# Altium PCB PCB1.PcbDoc
Units mil, origin at the board's own origin, x right, y up, seen from the top; angles counter-clockwise.
Board outline 6000 x 4000 mil, 2 copper layers (Top Layer, Bottom Layer); 4 components, 0 nets, 12 pads, 0 vias.
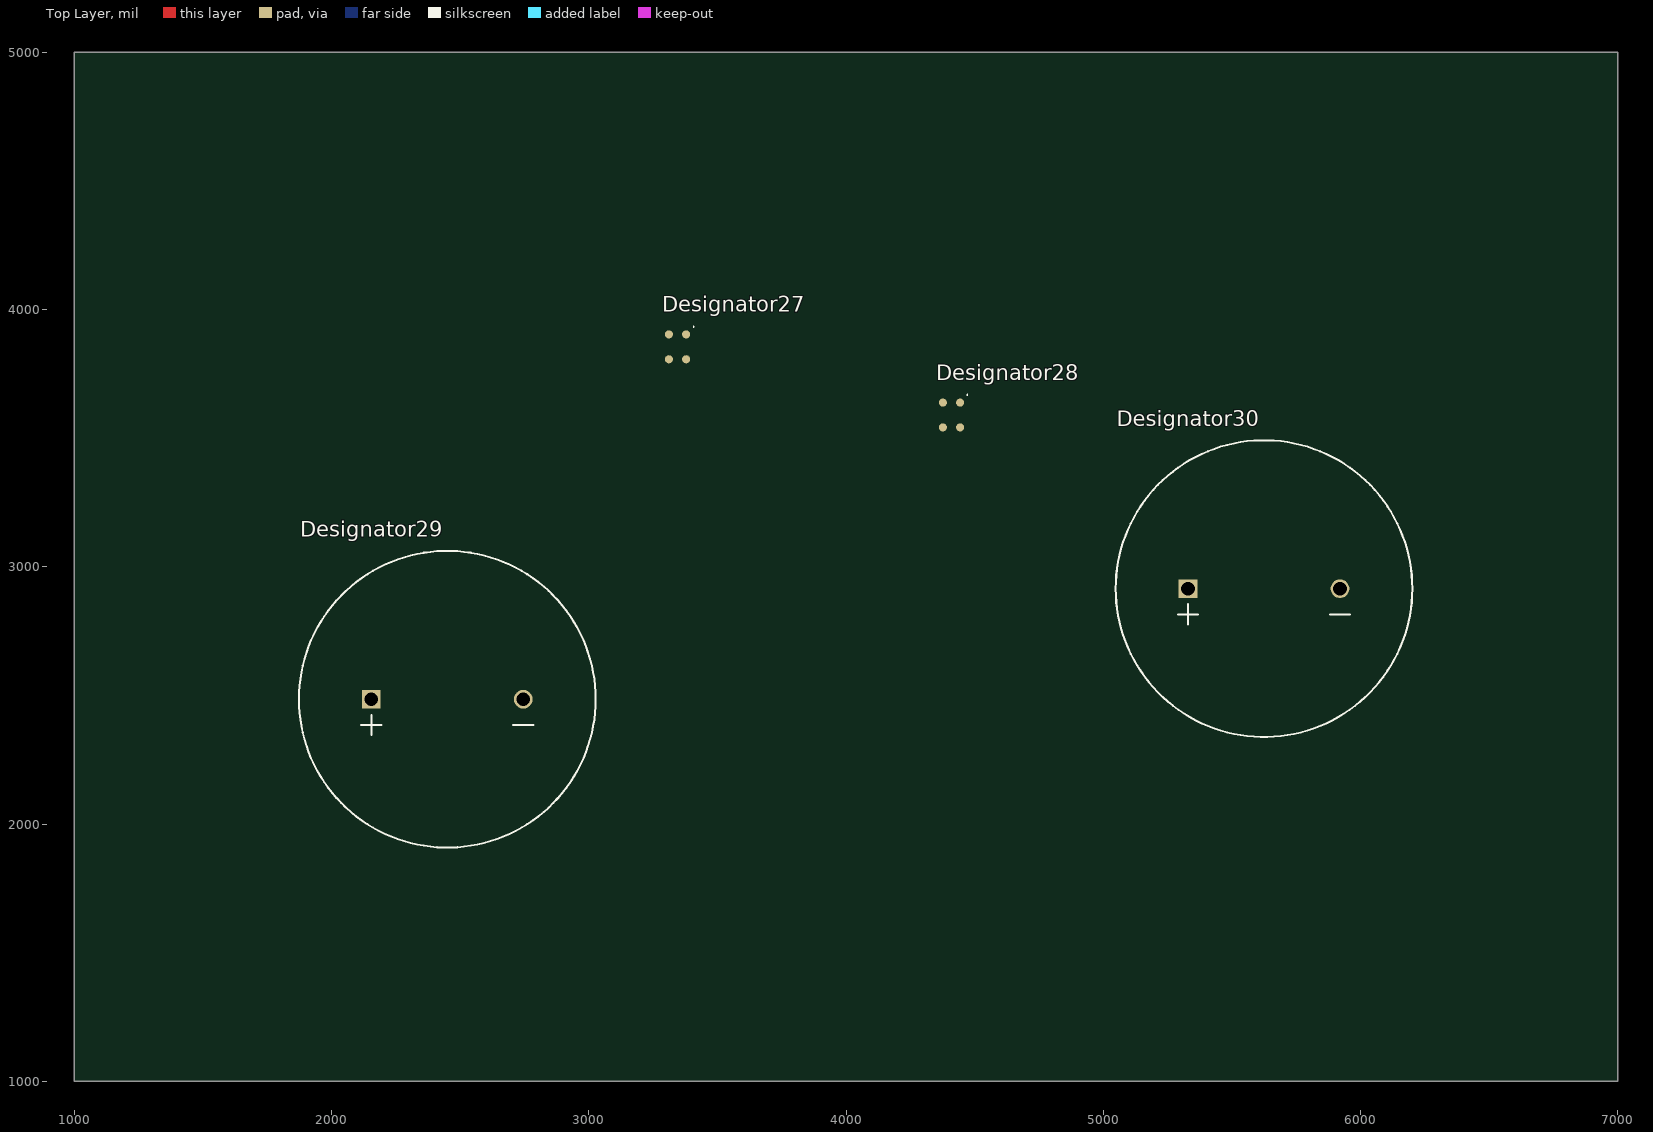
[diagram p0: Top Layer view]
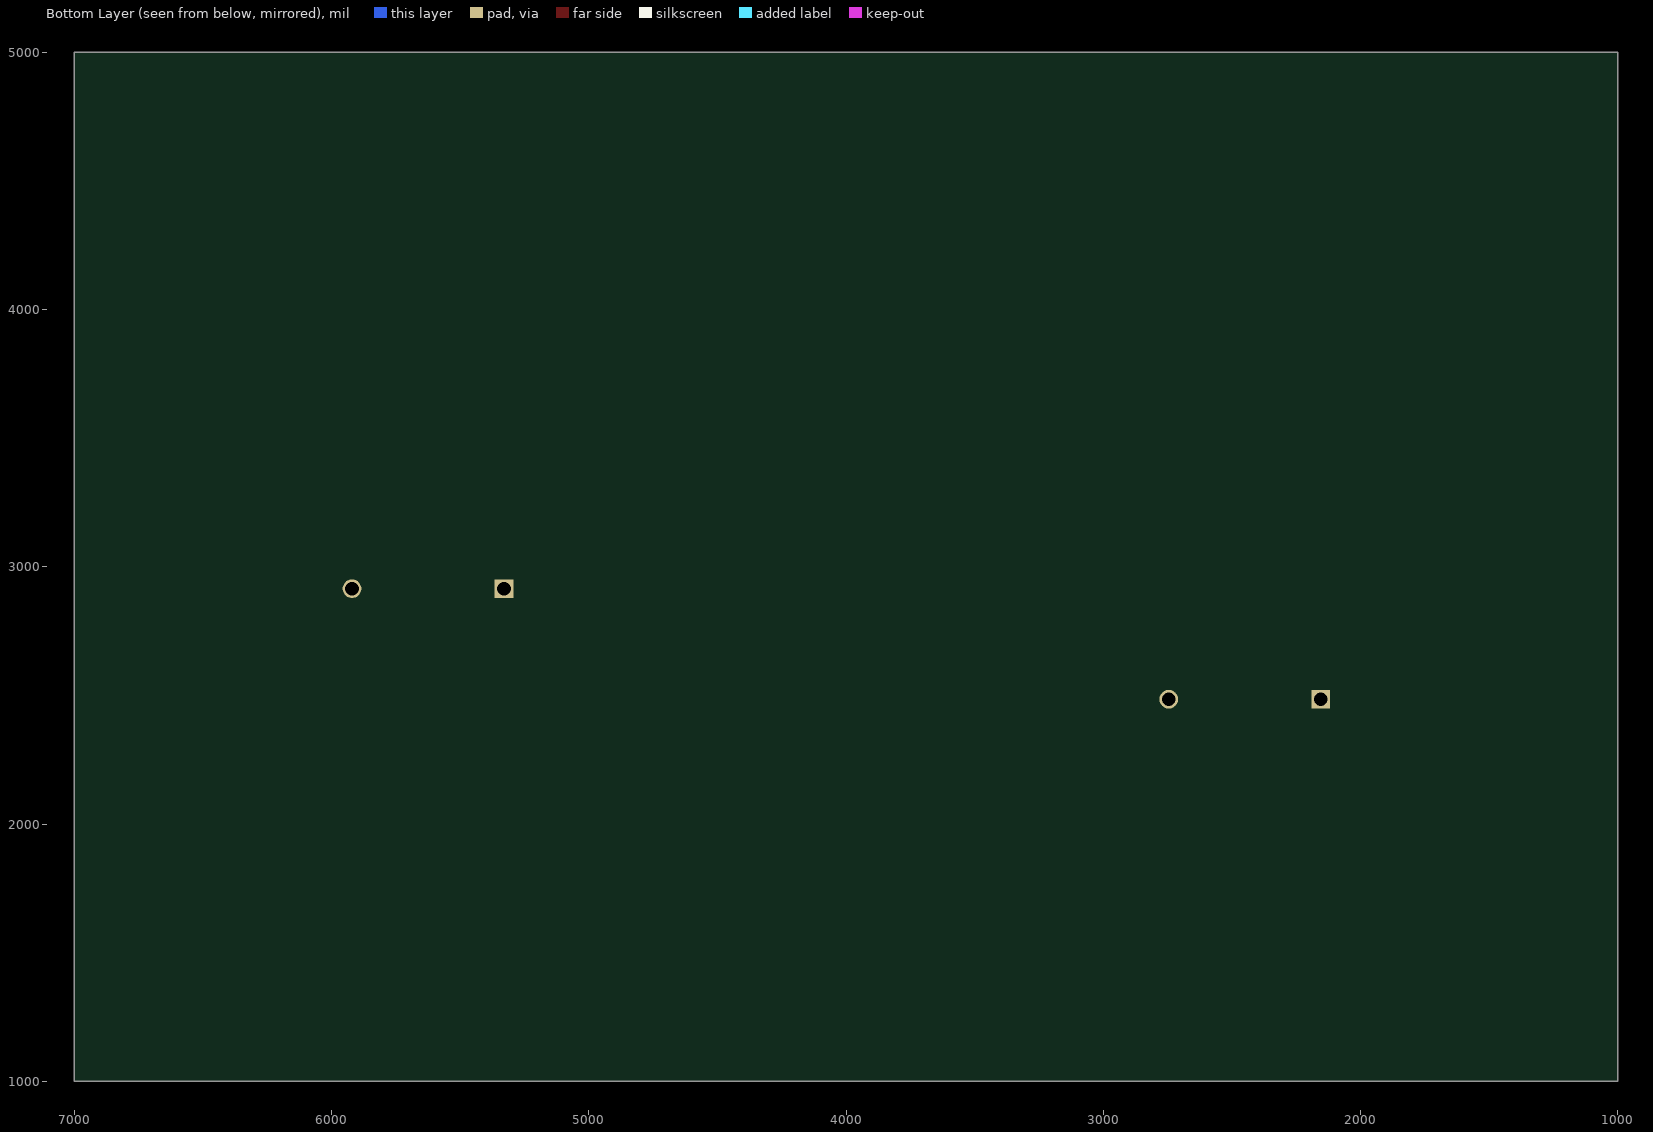
[diagram p1: Bottom Layer view, seen from below]

## Layer stack, top to bottom
Top Solder: solder mask 0.4, Solder Resist, Dk 3.5
Top Layer: signal copper 1.4
Dielectric 1: dielectric 12.6, FR-4, Dk 4.8
Bottom Layer: signal copper 1.4
Bottom Solder: solder mask 0.4, Solder Resist, Dk 3.5

## Board outline
1000,1000 7000,1000 7000,5000 1000,5000

## Design rules (kind name [scope] priority, off if disabled: settings)
Clearance [All] p1: gap=10 ignorepadtopadclearanceinfootprint=FALSE except(0: Arc-Hole Track-Hole SMDPad-Hole THPad-Hole Via-Hole Fill-Hole Poly-Hole Region-Hole Text-Hole)
PolygonConnect [All] p1: connectstyle=Relief reliefconductorwidth=10 reliefentries=4 polygonreliefangle="90 Angle" airgapwidth=10
RoutingVias [All] p1: holewidth=28 width=50 viastyle="Through Hole" minholewidth=28 minwidth=50 maxholewidth=28 maxwidth=50
SolderMaskExpansion [All] p1: expansion=4 istentingtop=FALSE
Width [All] p1: maxlimit=10 minlimit=10 preferedwidth=10
30 further rules are at their usual default settings.

## Components (designator, comment, footprint, x,y, rotation, side; value= is the part's Value field where it differs from the comment)
Designator27 "Comment" KNOW-SPU0409HD5H-PB_V 3345,3855 r0 top
Designator28 "Comment" KNOW-SPU0409HD5H-PB_V 4410,3590 r0 top
Designator29 "Comment" ADAI-ADA1898 2450,2485 r0 top
Designator30 "Comment" ADAI-ADA1898 5625,2915 r0 top

## Footprints (in the part's own frame and the unit in brackets; to place one, negate y for a bottom-side part, rotate by r counter-clockwise, add the part's x,y. Pads: shape width x height; smd on the part's side, far side on the other; paste and mask are expansions set on the pad)
ADAI-ADA1898 [mm] "THD, 2-Leads, Dia 29.3mm, Pitch 15mm"
  rect 1.85x1.85 hole 1.35: 1(-7.5,0)
  round 1.85 hole 1.35: 2(7.5,0)
  silkscreen extent -14.65,-14.65 14.65,14.65, body extent -14.65,-14.65 14.65,14.65, height 11.95
KNOW-SPU0409HD5H-PB_V [mm] "SMD, 4-Leads, Body 3.76x2.95mm"
  round 0.8 smd paste-1: 1(0.85,1.23) 4(-0.85,1.23)
  round 0.8 smd paste+0: 2(0.85,-1.23) 3(-0.85,-1.23)
  silkscreen extent 1.53,1.94 1.63,2.04, body extent -1.47,-1.88 1.48,1.88, height 0.9

## Nets (pads, with @x,y where several pads share a name; then routed paths per layer and width w, separated by ;. In a path a pad name is that pad's centre, name@x,y a point inside that pad or via, vN(x,y) a via of type N, cw(c..) or ccw(c..) an arc to the next point about the centre after c; other vN are vias at no path point)
pads on no net: Designator27.1 Designator27.2 Designator27.3 Designator27.4 Designator28.1 Designator28.2 Designator28.3 Designator28.4 Designator29.1 Designator29.2 Designator30.1 Designator30.2